# Altium PCB s2m.PcbDoc
Units mil, origin at the board's own origin, x right, y up, seen from the top; angles counter-clockwise.
Board outline 600 x 900 mil, 2 copper layers (Top Layer, Bottom Layer); 1 components, 2 nets, 11 pads, 2 vias.
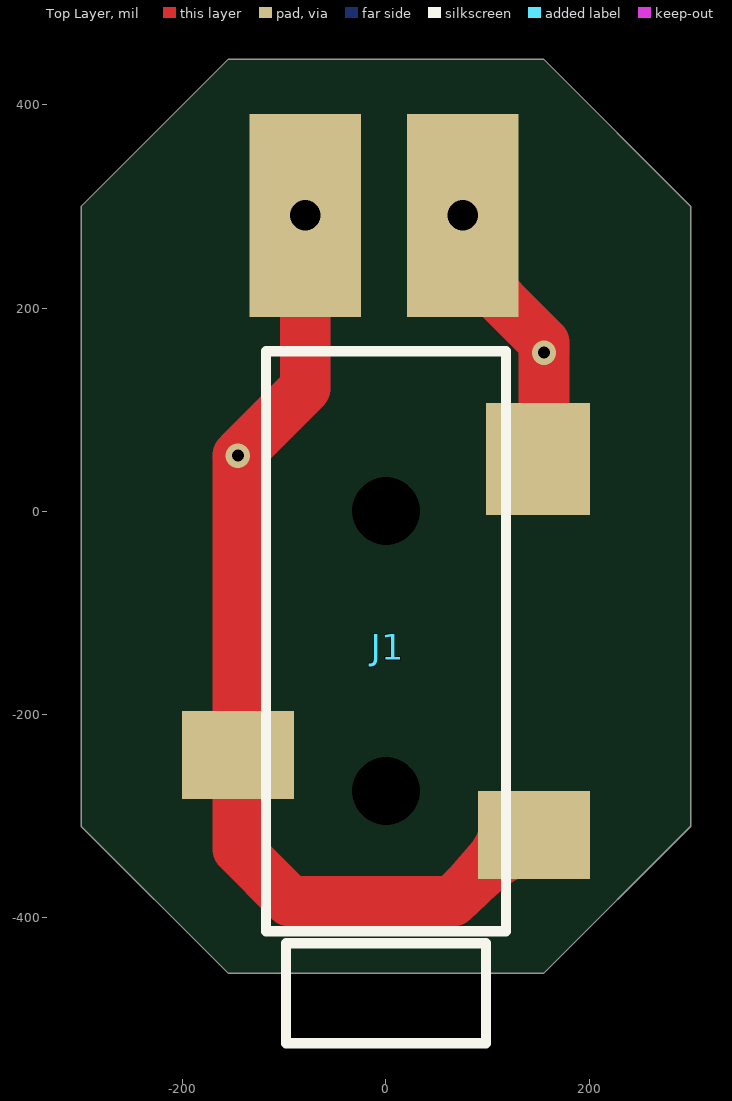
[diagram p0: Top Layer view]
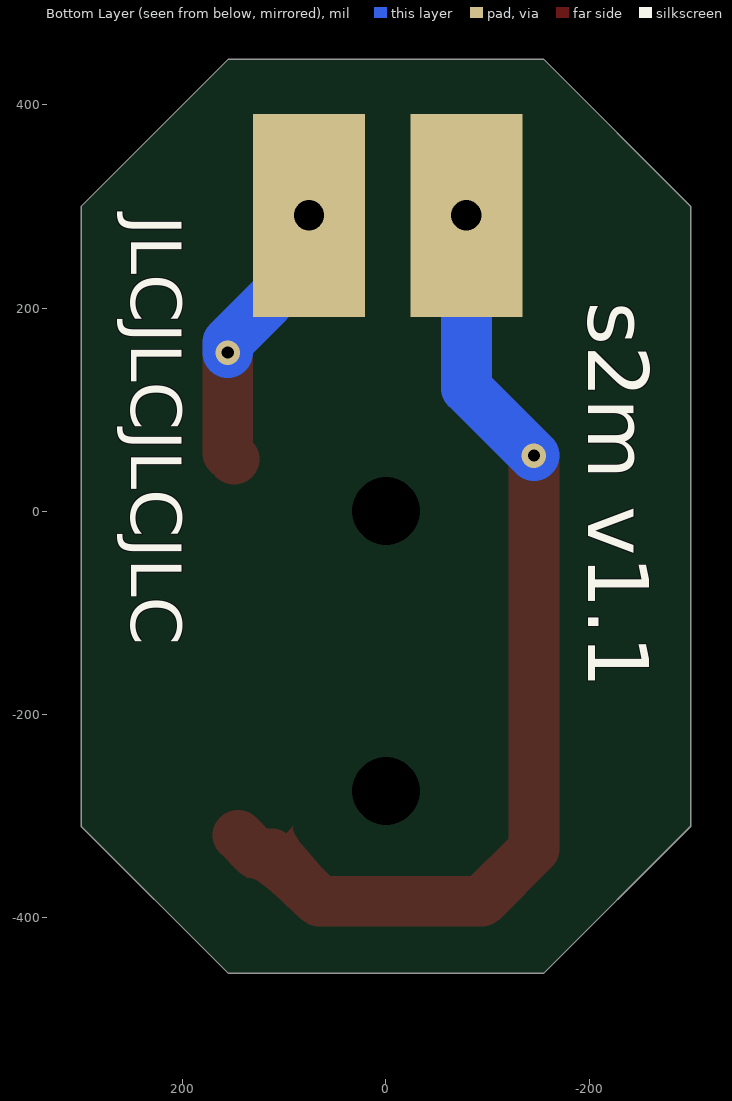
[diagram p1: Bottom Layer view, seen from below]

## Layer stack, top to bottom
Top Solder: solder mask 0.4, Solder Resist, Dk 3.5
Top Layer: signal copper 1.4
Dielectric 1: dielectric 12.6, FR-4, Dk 4.8
Bottom Layer: signal copper 1.4
Bottom Solder: solder mask 0.4, Solder Resist, Dk 3.5

## Board outline
-300,-310 -300,300 -155,445 155,445 300,300 300,-310 155,-455 -155,-455

## Design rules (kind name [scope] priority, off if disabled: settings)
Clearance [All] p1: gap=10 ignorepadtopadclearanceinfootprint=FALSE except(0: Arc-Hole Track-Hole SMDPad-Hole THPad-Hole Via-Hole Fill-Hole Poly-Hole Region-Hole Text-Hole)
PolygonConnect [All] p1: connectstyle=Relief reliefconductorwidth=10 reliefentries=4 polygonreliefangle="90 Angle" airgapwidth=10
RoomDefinition s2m [InComponentClass('s2m')] p1: confinementstyle=ConfineIn formatcopy=TRUE lockcomponents=FALSE outline -3820.75,-3177.48 -1820.75,-3177.48 -1820.75,-2177.48 -3820.75,-2177.48
RoutingVias [All] p1: holewidth=28 width=50 viastyle="Through Hole" minholewidth=28 minwidth=50 maxholewidth=28 maxwidth=50
SolderMaskExpansion [All] p1: expansion=4 istentingtop=FALSE
Width [All] p1: maxlimit=100 minlimit=10 preferedwidth=10 minimp=50.000000 maximp=50.000000 favimp=50.000000
30 further rules are at their usual default settings.

## Components (designator, comment, footprint, x,y, rotation, side; value= is the part's Value field where it differs from the comment)
J1 "SJ-3523" SJ-352X 0,-413.39 r90 top

## Footprints (in the part's own frame and the unit in brackets; to place one, negate y for a bottom-side part, rotate by r counter-clockwise, add the part's x,y. Pads: shape width x height; smd on the part's side, far side on the other; paste and mask are expansions set on the pad)
SJ-352X [mm]
  rect 2.2x2.8 smd: 1(2.4,-3.7) 3(4.4,3.7)
  rect 2.8x2.6 smd: 2(11.8,-3.8)
  round 0 hole 1.7 unplated: ""(3.5,0) ""(10.5,0)
  silkscreen extent -2.8,-3 14.5,3

## Free pads (board coordinates)
  rect 110x200 smd: 4(-79.33,291.1) 5(75.67,291.1)
  rect 110x200 smd far side: 4(-79.33,291.1) 5(75.67,291.1)
  round 60 hole 30: 6(-79.33,291.1) 7(75.67,291.1)

## Via types
v1: diameter 24, hole 12, Top Layer to Bottom Layer, 2 vias

## Nets (pads, with @x,y where several pads share a name; then routed paths per layer and width w, separated by ;. In a path a pad name is that pad's centre, name@x,y a point inside that pad or via, vN(x,y) a via of type N, cw(c..) or ccw(c..) an arc to the next point about the centre after c; other vN are vias at no path point)
Net_J1_1: J1.1 J1.3 pad.4 pad.6 | length 1252.6
  Top Layer w50: v1(-145.67,54.76) J1.3 -145.67,-332.56 -94.33,-383.9 65.67,-383.9 112.36,-337.2 127.36,-337.2 J1.1 ; v1@-144.33,56.1 -79.33,121.1 pad.6
  Bottom Layer w50: v1(-145.67,54.76) -79.33,121.1 pad.6
Net_J1_2: J1.2 pad.5 pad.7 | length 443.7
  Top Layer w50: pad.7 75.67,246.1 155.67,166.1 155.67,57.24 J1.2
  Bottom Layer w50: pad.7 75.67,246.1 155.67,166.1 v1(155.67,156.1)
pads on no net: J1.

## Silkscreen, mask and mechanical layers (free items; w line width, h text height)
Bottom Overlay:
  text "JLCJLCJLCJLC" at 250.67,291.1 h50 r90
  text "s2m v1.1" at -199.33,206.03 h60 r90
Mechanical 1:
  the board outline again, w10